# Altium PCB USB-RS485-unit.PcbDoc
Units mm, origin at the board's own origin, x right, y up, seen from the top; angles counter-clockwise.
Board outline 52 x 30 mm, 2 copper layers (Top Layer, Bottom Layer), stack 0.991 mm thick; 18 components, 14 nets, 90 pads, 0 vias.
Unrouted connection lines stored in the file: 36.
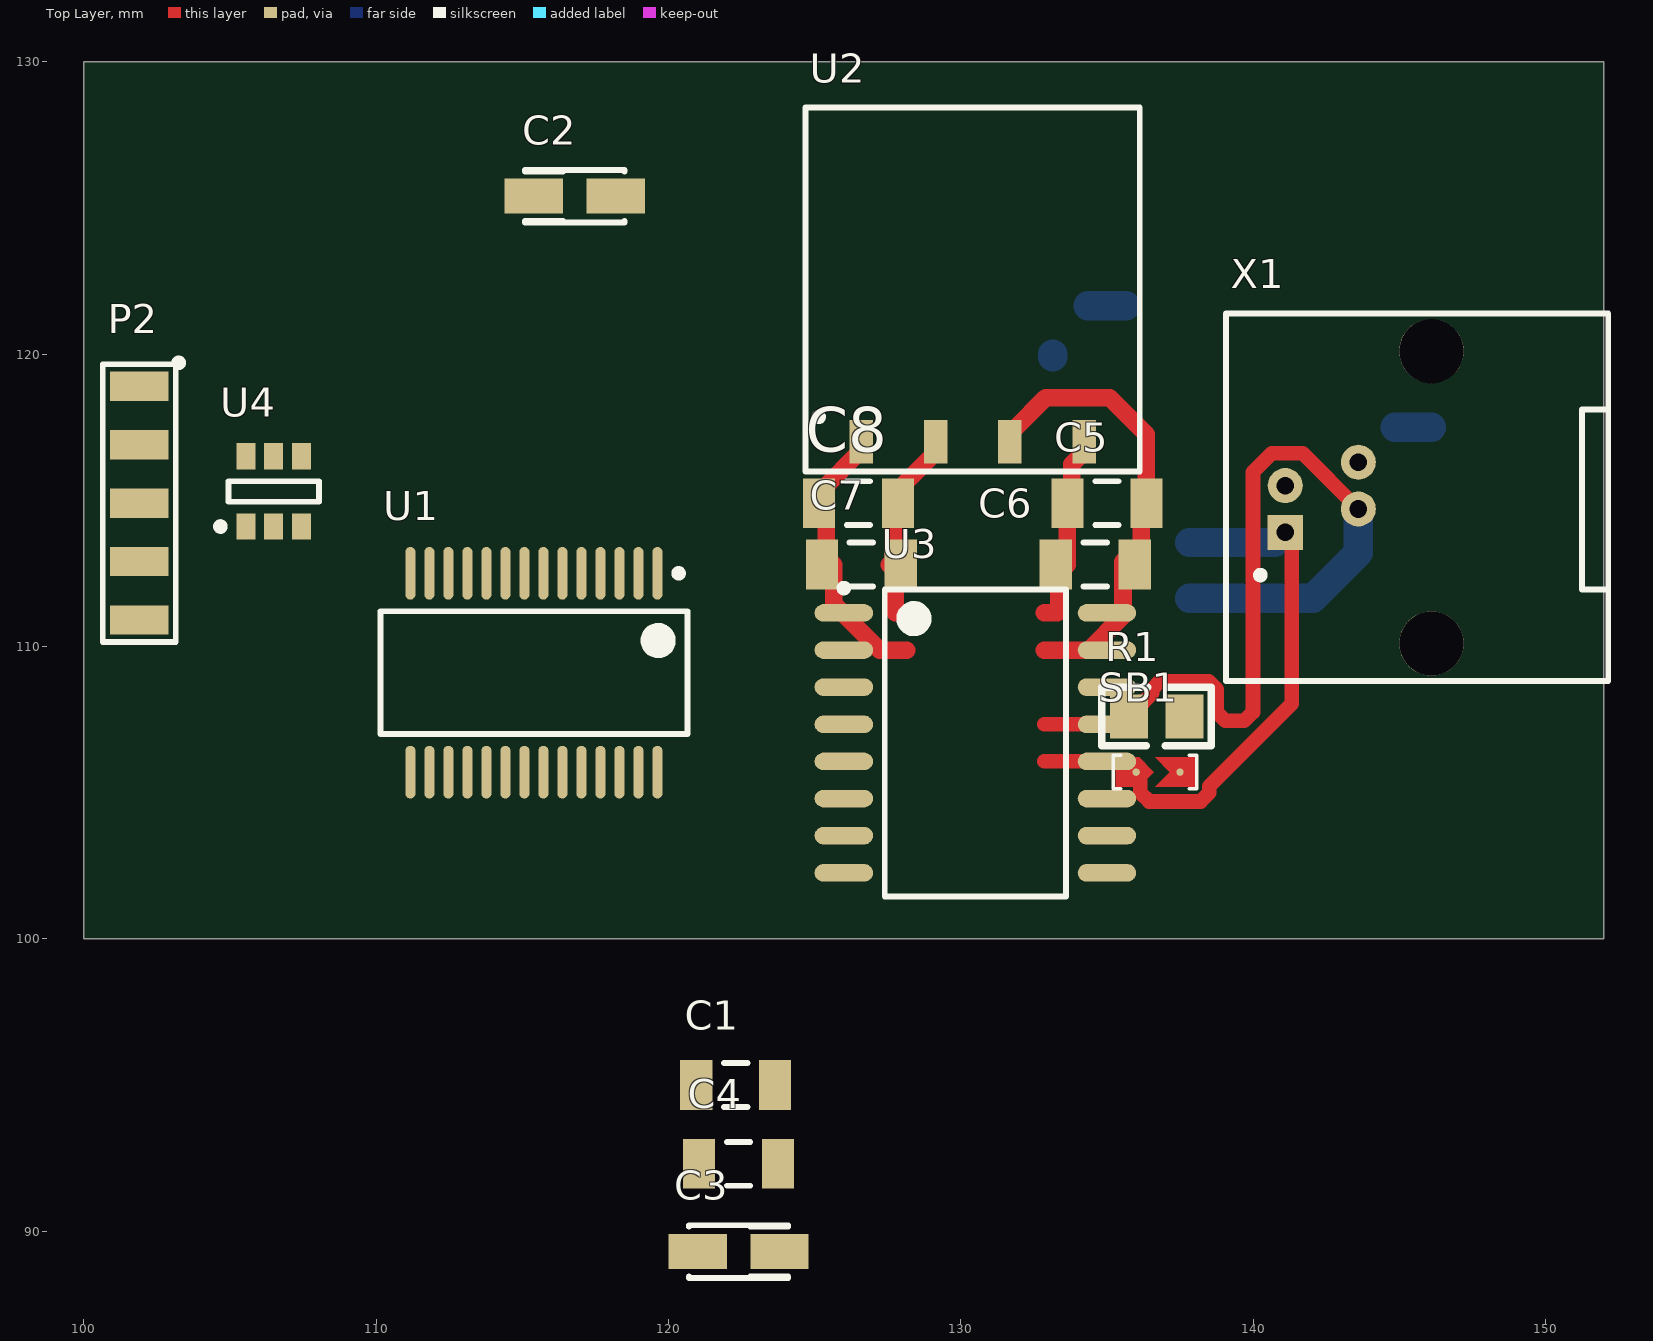
[diagram p0: Top Layer view]
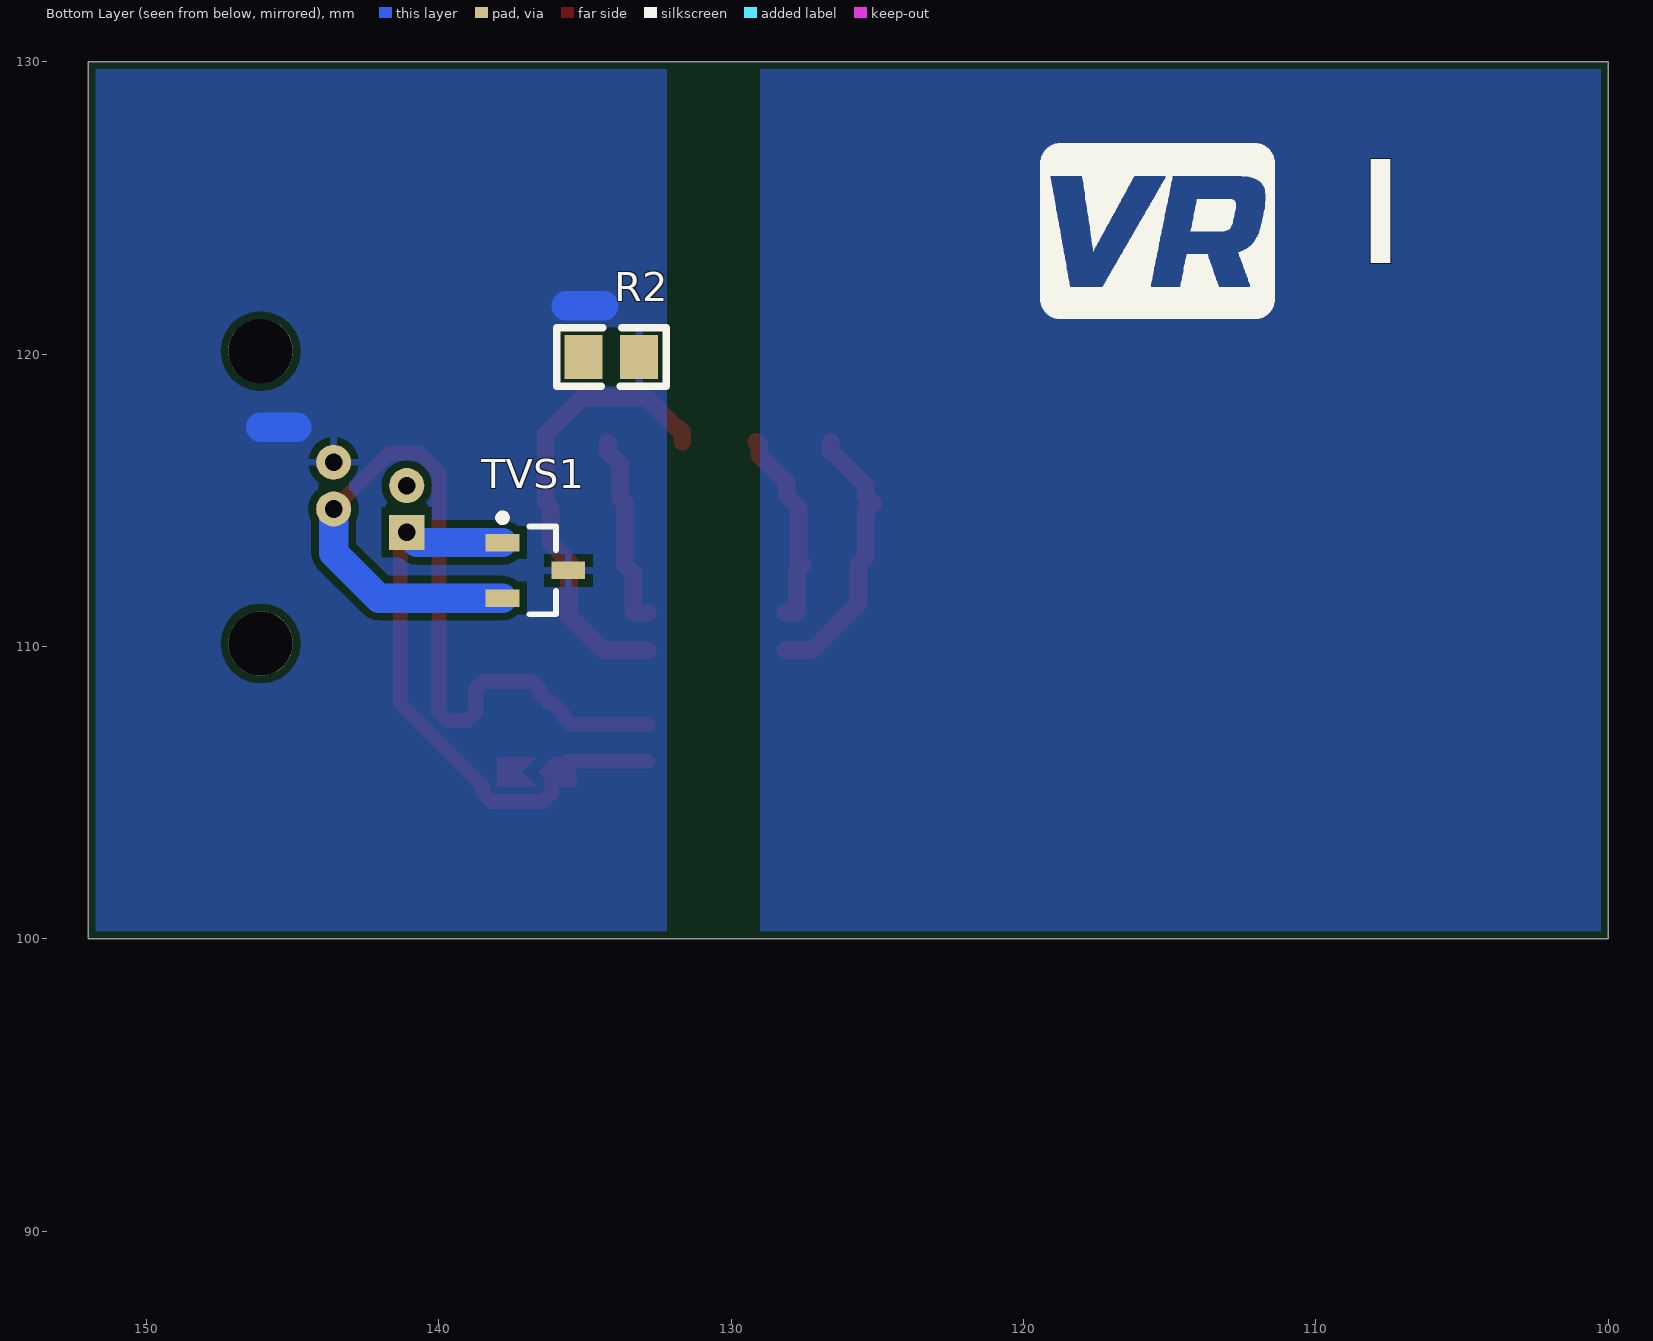
[diagram p1: Bottom Layer view, seen from below]

## Layer stack, top to bottom
Top Solder: solder mask 0.0102, Solder Resist, Dk 3.5
Top Layer: signal copper 0.0356
Dielectric 1: dielectric 0.92, FR-4, Dk 4.8
Bottom Layer: signal copper 0.0356
Bottom Solder: solder mask 0.0102, Solder Resist, Dk 3.5

## Board outline
100,100 152,100 152,130 100,130

## Design rules (kind name [scope] priority, off if disabled: settings)
BoardOutlineClearance [All] p1: gap=0.254 ignorepadtopadclearanceinfootprint=FALSE except(0: Arc-SplitContinuation Track-SplitContinuation SMDPad-SplitContinuation THPad-SplitContinuation Via-SplitContinuation Fill-SplitContinuation Poly-SplitContinuation Region-SplitContinuation Text-SplitContinuation)
Clearance Clearance-JLCPCB [All] p1: gap=0.254 ignorepadtopadclearanceinfootprint=TRUE except(0: Arc-Hole SMDPad-Hole THPad-Hole Via-Hole Fill-Hole Poly-Hole Region-Hole Text-Hole; 0.127: SMDPad-SMDPad; 0.2: Arc-Arc Arc-Track Arc-SMDPad Track-Track Track-SMDPad; 0.33: Track-Hole)
DiffPairsRouting [InDifferentialPair('USB')] p1: maxlimit=1 minlimit=0.3 mostfreqgap=0.3 toplayer_minwidth=0.381 toplayer_maxwidth=1 toplayer_prefwidth=0.5 bottomlayer_minwidth=0.381 bottomlayer_maxwidth=1 bottomlayer_prefwidth=0.5 maxuncoupledlength=12.7
HoleSize HoleSize-Pad-JLCPCB [IsPad] p1: absolutevalues=TRUE maxlimit=6.35 minlimit=0.7 maxpercent=80.000 minpercent=20.000 // The annular ring size will be enlarged to 0.15mm in production. Plated! Tolerance is +0.13/-0.08mm
HoleSize HoleSize-PTH-JLCPCB [InDrillLayerPair('Top Layer - Bottom Layer')] p2: absolutevalues=TRUE maxlimit=6.35 minlimit=0.2 maxpercent=80.000 minpercent=20.000 // The annular ring size will be enlarged to 0.15mm in production. Plated! Tolerance is +0.13/-0.08mm
HoleSize HoleSize-Via-JLCPCB [IsVia] p3: absolutevalues=TRUE maxlimit=6.35 minlimit=0.3 maxpercent=80.000 minpercent=20.000 // Plated! Tolerance is +0.13/-0.08mm
HoleSize "HoleSize-Mechanical hole-JLCPCB" [InDrillLayerPair('Top Layer - Bottom Layer')] p4: absolutevalues=TRUE maxlimit=6.3 minlimit=0.2 maxpercent=80.000 minpercent=20.000 // Non plated! Tolerance is +-0.2mm
HoleToHoleClearance HoleToHoleClearance-JLCPCB [All] p1: gap=0.5 allowstackedmicrovias=TRUE
MinimumAnnularRing MinimumAnnularRing-2oz-JLCPCB [All] p1: minimumring=0.2 // 75um
MinimumAnnularRing MinimumAnnularRing-1oz-JLCPCB [All] p2: minimumring=0.13 // 35um
MinimumSolderMaskSliver MinimumSolderMaskSliver-JLCPCB [All] p1: minsoldermaskwidth=0.254
PlaneConnect [All] p1: planeconnectstyle=Relief reliefexpansion=0.508 reliefentries=4 reliefconductorwidth=0.4 reliefairgap=0.4
PolygonConnect [All] p1: connectstyle=Relief reliefconductorwidth=0.254 reliefentries=4 polygonreliefangle="90 Angle" airgapwidth=0.254
RoomDefinition USB-RS485-unit_1 [InComponentClass('USB-RS485-unit')] p1: confinementstyle=ConfineOut formatcopy=TRUE lockcomponents=FALSE outline 100,100 152,100 152,101 100,101
RoomDefinition USB-RS485-unit [InComponentClass('USB-RS485-unit')] p2: confinementstyle=ConfineOut formatcopy=TRUE lockcomponents=FALSE outline 100,129 152,129 152,130 100,130
RoutingVias RoutingVias-JLCPCB [All] p1: holewidth=0.6 width=1.2 viastyle="Through Hole" minholewidth=0.3 minwidth=0.6 maxholewidth=6.35 maxwidth=6
SilkToSolderMaskClearance SilkToSolderMaskClearance-JLCPCB [IsPad] p1: minsilkscreentomaskgap=0.15 clearancetoexposedcopper=FALSE
SolderMaskExpansion SolderMaskExpansion-JLCPCB [All] p1: expansion=0.05
Width Width-1oz-JLCPCB [All] p1: maxlimit=3 minlimit=0.127 preferedwidth=0.5
Width Width-2oz-JLCPCB [All] p2 off: maxlimit=3 minlimit=0.2 preferedwidth=0.3
24 further rules are at their usual default settings.

## Classes and differential pairs
differential pair class 3: IN
differential pair class 2: USB1
differential pair class 1: USB
differential pair IN: +IN_P -IN_N
differential pair USB1: +USB1_P -USB1_N
differential pair USB: +USB_P -USB_N

## Components (designator, comment, footprint, x,y, rotation, side; value= is the part's Value field where it differs from the comment)
C1 "0.1uF" C1206 122.3,95 r0 top
C2 "0.1uF" TC3216-1206 116.8,125.4 r0 top
C3 "4.7uF" TC3216-1206 122.4,89.3 r180 top
C4 "0.1uF" C1206 122.4,92.3 r0 top
C5 "10uF" C1206 135,114.9 r180 top
C6 "0.1uF" C1206 134.6,112.8 r180 top
C7 "0.1uF" C1206 126.6,112.8 r0 top
C8 "4.7uF" C1206 126.5,114.9 r0 top
P2 "USB pads" "USB SOLDERING PADS" 101.9,118.9 r270 top value="USB Pads"
R1 "120" RES-0805 136.7,107.6 r180 top
R2 "330" RES-0805 134.1,119.9 r0 bottom
SB1 "SB_OFF" SOLDER-BRIDGE-R0603-0R 136.5,105.7 r0 top
TVS1 "CDSOT23-SM712" SOT-23B_N 136.7,112.6 r180 bottom
U1 "FT232RL-Reel" SSOP-28_L 115.4,109.1 r270 top
U2 "B0505S" "B0505S - HORIZONTAL" 126.6,117 r0 top
U3 "ADM2483" "SOL-16 WIDE" 130.5,106.7 r0 top
U4 "USBLC6-2" SOT23-6 106.5,115.3 r90 top
X1 "RJ11" RJ11 141.1,113.9 r90 top

## Footprints (in the part's own frame and the unit in brackets; to place one, negate y for a bottom-side part, rotate by r counter-clockwise, add the part's x,y. Pads: shape width x height; smd on the part's side, far side on the other; paste and mask are expansions set on the pad)
"B0505S - HORIZONTAL" [mm] "Isolated DC-DC"
  rect 0.8x1.5 smd: 1(0,0) 2(2.54,0) 3(5.08,0) 4(7.62,0)
  silkscreen extent -1.91,-1.02 9.53,11.43, body extent -1.94,-0.27 9.56,11.4, height 6.01
C1206 [mm] "Chip Capacitor, Body 3.2x1.6mm, IPC High Density"
  rect 1.1x1.7 smd: 1(-1.35,0) 2(1.35,0)
  silkscreen extent -0.4,-0.75 0.4,0.75, body extent -1.6,-0.8 1.6,0.82, height 1.64
RES-0805 [mm] "Chip Resistor; Body 2 x 1.3 mm (LxW typ)"
  rect 1.3x1.5 smd: 1(-0.95,0) 2(0.95,0)
  silkscreen extent -1.88,-1 1.88,1, body extent -1.24,-0.65 1.29,0.6, height 0.51
RJ11 [mm] "Connector"
  rect 1.2x1.2 hole 0.6: 1(0,0)
  round 1.2 hole 0.6: 2(0.8,-2.5) 3(1.6,0) 4(2.4,-2.5)
  round 2.2 hole 2.2 unplated: 5(-3.8,-5) 5(6.2,-5)
  silkscreen extent -5.08,-11.05 7.49,2.03, body extent -5.11,-11 7.51,2, height 14.61
"SOL-16 WIDE" [mm] "16-Pin Small Outline Integrated Circuit 1.27 mm Pitch, Wide Body"
  oval 2x0.6 smd: 1(-4.5,4.445) 2(-4.5,3.175) 3(-4.5,1.905) 4(-4.5,0.635) 5(-4.5,-0.635) 6(-4.5,-1.905) 7(-4.5,-3.175) 8(-4.5,-4.445) 9(4.5,-4.445) 10(4.5,-3.175) 11(4.5,-1.905) 12(4.5,-0.635) 13(4.5,0.635) 14(4.5,1.905) 15(4.5,3.175) 16(4.5,4.445)
  silkscreen extent -4.62,-5.25 3.1,5.42, body extent -5.11,-5.15 5.21,5.15, height 2.66
SOLDER-BRIDGE-R0603-0R [mil]
  round 10 smd paste-393.7: 1(-19.68,0) 2(39.37,0)
  Top Layer region: -47.24,-19.69 -47.24,19.68 -15.75,19.68 3.94,0 -15.75,-19.69 -47.24,-19.69
  Top Layer region: 5.91,19.68 25.59,0 5.91,-19.69 59.06,-19.69 59.06,19.68 5.91,19.68
  silkscreen extent -50,-23 62,23, body extent -36,-20 36,20, height 20
SOT23-6 [mm] "SOT23, 5-Leads, Body 2.9x1.6mm, Pitch 0.95mm, Lead Span 2.8mm, IPC High Density"
  rect 0.9x0.65 smd: 1(-1.2,0.95) 2(-1.2,0) 3(-1.2,-0.95) 4(1.2,-0.95) 5(1.2,0) 6(1.2,0.95)
  silkscreen extent -1.32,-1.55 0.35,1.95, body extent -1.2,-1.45 1.19,1.45, height 1
SOT-23B_N [mm] "SOT23, 3-Leads, Body 2.9x1.3mm, Pitch 0.95mm, Lead Span 2.4mm, IPC Medium Density"
  rect 1.15x0.6 smd: 1(-1.125,0.95) 2(-1.125,-0.95) 3(1.125,0)
  silkscreen extent -1.25,-1.5 0.7,1.92, body extent -1.14,-1.45 1.19,1.45, height 1
SSOP-28_L [mm] "SOP, 28-Leads, Body 10.2x5.3mm, Pitch 0.65mm, IPC High Density"
  oval 1.8x0.35 smd: 1(-3.4,4.225) 2(-3.4,3.575) 3(-3.4,2.925) 4(-3.4,2.275) 5(-3.4,1.625) 6(-3.4,0.975) 7(-3.4,0.325) 8(-3.4,-0.325) 9(-3.4,-0.975) 10(-3.4,-1.625) 11(-3.4,-2.275) 12(-3.4,-2.925) 13(-3.4,-3.575) 14(-3.4,-4.225) 15(3.4,-4.225) 16(3.4,-3.575) 17(3.4,-2.925) 18(3.4,-2.275) 19(3.4,-1.625) 20(3.4,-0.975) 21(3.4,-0.325) 22(3.4,0.325) 23(3.4,0.975) 24(3.4,1.625) 25(3.4,2.275) 26(3.4,2.925) 27(3.4,3.575) 28(3.4,4.225)
  silkscreen extent -3.52,-5.25 2.1,5.25, body extent -3.91,-5.1 3.91,5.1, height 1.97
TC3216-1206 [mm] "Capacitor, SM Tantalum; Body 3.2 x 1.6 mm (LxW typ)"
  rect 2x1.2 smd: 1(-1.4,0) 2(1.4,0)
  silkscreen extent -1.7,-0.9 1.7,0.9, body extent -1.7,-0.95 1.7,0.95, height 1.84
"USB SOLDERING PADS" [mm] "Isolated DC-DC"
  rect 1x2 smd: 1(0,0) 2(2,0) 3(4,0) 4(6,0) 5(8,0)
  silkscreen extent -0.92,-1.25 8.75,1.48

## Part data
C1 C4 C6 C7: library part Cap, "Capacitor ceramic SMT", Manufacturer=Murata, Manufacturer_Part_Number=GRM319R71H104K, Order_Code_ChipIDip=348319975, Part_Type="Chip Capacitor"
C2: library part "Cap Polarized", "Polarized Capacitor SMT", Manufacturer=TECAP, Manufacturer_Part_Number=TECAP0.1/35VA10, Order_Code_ChipIDip=1654, Part_Type="Polarized Capacitor"
C3: library part "Cap Polarized", "Polarized Capacitor SMT", Manufacturer=TECAP, Manufacturer_Part_Number=TECAP4.7/10VA10, Order_Code_ChipIDip=6038, Part_Type="Polarized Capacitor"
C5: library part Cap, "Capacitor ceramic SMT", Manufacturer=Murata, Manufacturer_Part_Number=GRM31A7U3A100JW31D, Order_Code_ChipIDip=9000122773, Part_Type="Chip Capacitor"
C8: library part Cap, "Capacitor ceramic SMT", Manufacturer=Murata, Manufacturer_Part_Number=GRM31CR71E475KA88L, Order_Code_ChipIDip=9000122604, Part_Type="Chip Capacitor"
P2: "Pads for soldering USB cable", Part_Type=Mechanical
R1: library part Res, "Rectangular Thick Film Chip Resistor", Manufacturer=Yageo, Manufacturer_Part_Number=RC0805FR-07120RL, ComponentLink1Description="Manufacturer Link", ComponentLink1URL=http://www.panasonic.com/industrial/components/resistive_products.htm, ComponentLink2Description=Datasheet, ComponentLink2URL=http://www.panasonic.com/industrial/components/pdf/AOA0000CE8.pdf, Order_Code_ChipIDip=9000079464, Part_Type=Resistor
R2: library part Res, "Rectangular Thick Film Chip Resistor", Manufacturer=Yageo, Manufacturer_Part_Number=RC0805FR-07330RL, ComponentLink1Description="Manufacturer Link", ComponentLink1URL=http://www.panasonic.com/industrial/components/resistive_products.htm, ComponentLink2Description=Datasheet, ComponentLink2URL=http://www.panasonic.com/industrial/components/pdf/AOA0000CE8.pdf, Order_Code_ChipIDip=9000079474, Part_Type=Resistor
SB1: "Solder Bridge OFF", ComponentLink1Description=Datasheet, Part_Type=Mechanical
TVS1: "Surface Mount TVS Diode", Manufacturer=Bourns, Package=SOT-23, ComponentLink1Description=Datasheet, ComponentLink1URL=http://tunmcdsvn.tun.st.com/Component_Datasheet_Library/Trunk/Diodes/STM_ESD_ESDA6V1BC6, Manufacturer_Part_Number=CDSOT23-SM712, Order_Code_ChipIDip=9000168919, Part_Type=TVS
U1: "USB UART Asynchronous Serial Data Transfer Chip, SSOP-28, Tape and Reel", Manufacturer=FTDI, ComponentLink1Description="Manufacturer Link", ComponentLink1URL=http://www.ftdichip.com/Products/ICs/FT232R.htm, ComponentLink2Description=Datasheet, ComponentLink2URL=http://www.ftdichip.com/Support/Documents/DataSheets/ICs/DS_FT232R.pdf, Manufacturer_Part_Number=FT232RL-Reel, Order_Code_ChipIDip=201330607, Part_Type=Driver
U2: "Isolated DC-DC Converter", Manufacturer="Mornsun Power", Manufacturer_Part_Number=B0505S-1WR2, Package=SIP, ComponentLink1Description=Datasheet, ComponentLink1URL=http://tunmcdsvn.tun.st.com/Component_Datasheet_Library/Trunk/Diodes/STM_ESD_ESDA6V1BC6, Order_Code_ChipIDip=9000304516, Part_Type=DC-DC
U3: "Half-Duplex, Isolated RS-485 Transceiver", Manufacturer=STMICROELECTRONICS, Manufacturer_Part_Number=ADM2483BRWZ-REEL, Package=SOIC-W, ComponentLink1Description=Datasheet, ComponentLink1URL=http://tunmcdsvn.tun.st.com/Component_Datasheet_Library/Trunk/Diodes/STM_ESD_ESDA6V1BC6, Order_Code_ChipIDip=9000375326, Part_Type=Transceiver
U4: "Quad Bidir ESD protection", Manufacturer=STMICROELECTRONICS, Manufacturer_Part_Number=USBLC6-2SC6, ComponentLink1Description=Datasheet, ComponentLink1URL=http://tunmcdsvn.tun.st.com/Component_Datasheet_Library/Trunk/Diodes/STM_ESD_ESDA6V1BC6, Order_Code_ChipIDip=9000039051, Part_Type="ESD Protection", Status=Released
X1: "RJ-11 Connector, 4-Pin", Manufacturer=Connfly, Manufacturer_Part_Number=DS1132-S40BPX, Order_Code_ChipIDip=9000190984, Part_Type=Connector

## Nets (pads, with @x,y where several pads share a name; then routed paths per layer and width w, separated by ;. In a path a pad name is that pad's centre, name@x,y a point inside that pad or via, vN(x,y) a via of type N, cw(c..) or ccw(c..) an arc to the next point about the centre after c; other vN are vias at no path point)
+5: C2.1 C3.1 C4.2 C7.2 C8.2 P2.1 U1.4 U1.20 U2.2 U3.1 U3.5 U3.7 U4.5 | length 7
  Top Layer w0.6: 128.15,111.145 127.759,111.145 127.759,112.591 127.55,112.8 127.7,112.95 127.7,114.75 C8.2 128.1,115.15 128.1,115.6 129.04,116.54 129.04,116.9 U2.2
GND: C1.1 C2.2 C3.2 C4.1 C7.1 C8.1 P2.4 P2.5 U1.7 U1.18 U1.21 U1.25 U1.26 U2.1 U3.2 U3.4 U3.8 U4.2 | length 9.5
  Top Layer w0.6: U2.1 126.6,116.65 126.5,116.55 126.45,116.55 125.4,115.5 125.4,115.15 C8.1 125.4,114.65 125.4,113.05 125.65,112.8 125.65,111.45 127.225,109.875 128.15,109.875
GNDA: C5.1 C6.1 R2.1 TVS1.3 U2.3 U3.9 U3.15 X1.4 | length 18.4
  Top Layer w0.6: U2.3 131.68,117.35 131.78,117.45 131.85,117.45 132.9,118.5 135.1,118.5 136.35,117.25 C5.1 136.176,114.726 136.176,113.526 135.55,112.9 135.55,112.8 135.55,111.05 134.375,109.875 132.85,109.875
  Bottom Layer w1: R2.1 R2.1@133.15,120 ; 134.35,121.65 135.65,121.65 ; X1.4 X1.4@143.654,116.3 ; 144.854,117.5 146.1,117.5
IN_N: R1.2 TVS1.2 U3.13 X1.2 | length 29.8
  Top Layer w0.5: 132.85,107.335 135.485,107.335 R1.2 135.75,107.7 136.15,108.1 136.257,108.1 136.55,108.393 136.55,108.536 136.814,108.8 138.486,108.8 138.75,108.536 138.75,107.746 139.043,107.454 139.703,107.454 139.996,107.746 139.996,115.957 140.643,116.604 141.696,116.604 X1.2
  Bottom Layer w1: TVS1.2 142.05,111.65 143.6,113.2 X1.2
IN_P: SB1.1 TVS1.1 U3.12 X1.1 | length 20.3
  Top Layer w0.5: 132.85,106.065 135.635,106.065 SB1.1 136.146,105.554 136.146,104.991 136.441,104.696 138.209,104.696 138.504,104.991 138.504,105.221 141.325,108.042 141.325,113.675 X1.1
  Bottom Layer w1: TVS1.1 140.75,113.55 X1.1
NetC1_2: C1.2 U1.17
NetR1_1: R1.1 SB1.2
RXD: U1.5 U3.3
TXD: U1.1 U3.6
USB1_N: P2.2 U4.1
USB1_P: P2.3 U4.3
USB_N: U1.16 U4.6
USB_P: U1.15 U4.4
VCC: C5.2 C6.2 R2.2 U2.4 U3.16 | length 6.7
  Top Layer w0.6: 132.85,111.145 133.301,111.145 133.347,111.191 133.347,112.497 133.65,112.8 C5.2 133.804,115.054 133.804,116.234 134.22,116.65 U2.4
pads on no net: U1.2 U1.3 U1.6 U1.8 U1.9 U1.10 U1.11 U1.12 U1.13 U1.14 U1.19 U1.22 U1.23 U1.24 U1.27 U1.28 U3.10 U3.11 U3.14 X1.3 X1.5

## Polygon pours and split planes (outlines as drawn)
no net on Top Solder "isolation" (solid, pour order 0): 129.2,132 131.8,132 131.8,98.4 129.2,98.4
no net on Bottom Solder "isolation2" (solid): 129.3,130.7 131.9,130.7 131.9,97.1 129.3,97.1
GND on Bottom Layer "GND-D" (solid, pour order 6): 100,100 100,130 129,130 129,100
GNDA on Bottom Layer "GND-A" (solid, remove dead copper, pour order 2): 132.2,100 152,100 152,130 132.2,130

## Silkscreen, mask and mechanical layers (free items; w line width, h text height)
Bottom Overlay:
  drawing of 2 lines, arcs and shapes, not listed
  text "I" at 108.8,121.2 h10
M1-Board Shape:
  the board outline again, w0.2
M2-Board Dimensions:
  region: 165.807,126.698 164.791,126.698 165.299,130
  region: 165.299,100 164.791,103.302 165.807,103.302
  region: 152,142.525 148.698,142.017 148.698,143.033
  region: 103.302,142.017 100,142.525 103.302,143.033
  lines w0.2: 100,131 100,143.525 ; 100,142.525 152,142.525 ; 152,131 152,143.525 ; 153,100 166.299,100 ; 153,130 166.299,130 ; 165.299,100 165.299,130
  text "52.00" at 120.992,146.996 h1
  text "30.00" at 160.829,108.736 h1 r90
M7-Top Info:
  lines w0.2: 96.6,115.1 150.9,115.1